# EAGLE board board_rev3 (EAGLE 4.16)

Size 64.75 x 153.34 mm. Coordinates in mm from the lower left corner, seen from the top.
Outline: 0,0 64.75,2.54 64.75,153.34 0,153.34 0,0
Copper layers (1*16): Top 0.035mm / dielectric 1.5mm / Bottom 0.035mm
Design rules "default": minimum track width 10mil, minimum drill 24mil, track to track 8mil, track to pad 8mil, pad to pad 8mil, via to via 8mil, smd to smd 8mil, copper to edge 40mil, drill to drill 8mil, minimum pad ring 10mil, minimum via ring 8mil, stop-mask expansion 4mil, vias tented up to drill 0mil, thermal gap 10mil

## Footprints (pad centres in the part's own frame; a part is rotated, then mirrored left to right if it is on the bottom)
CAP_POLI = drill 0.8 round: . -5.08,0; .. 0,0
E5-10,5 = drill 1.016 pad 2.54 round: + -2.54,0 | drill 1.016 pad 2.54 octagon: - 2.54,0
E2,5-6 = drill 0.813 pad 1.6 round: + -1.27,0 | drill 0.813 pad 1.6 octagon: - 1.27,0
DO35-10 = drill 0.813 long: A 5.08,0; C -5.08,0
CR2032V = drill 1.321 pad 3.15 octagon: + -2.54,-5.08; +@1 -2.54,5.08; - 2.286,0
DIL16 = drill 0.813 long: 1 -8.89,-3.81; 2 -6.35,-3.81; 3 -3.81,-3.81; 4 -1.27,-3.81; 5 1.27,-3.81; 6 3.81,-3.81; 7 6.35,-3.81; 8 8.89,-3.81; 9 8.89,3.81; 10 6.35,3.81; 11 3.81,3.81; 12 1.27,3.81; 13 -1.27,3.81; 14 -3.81,3.81; 15 -6.35,3.81; 16 -8.89,3.81
DIL14 = drill 0.813 long: 1 -7.62,-3.81; 2 -5.08,-3.81; 3 -2.54,-3.81; 4 0,-3.81; 5 2.54,-3.81; 6 5.08,-3.81; 7 7.62,-3.81; 8 7.62,3.81; 9 5.08,3.81; 10 2.54,3.81; 11 0,3.81; 12 -2.54,3.81; 13 -5.08,3.81; 14 -7.62,3.81
DIL08 = drill 0.813 long: 1 -3.81,-3.81; 2 -1.27,-3.81; 3 1.27,-3.81; 4 3.81,-3.81; 5 3.81,3.81; 6 1.27,3.81; 7 -1.27,3.81; 8 -3.81,3.81
ADT7318SMD = smd 0.635 x 1.27: 1 -10.16,-1.27; 2 -8.89,-1.27; 3 -7.62,-1.27; 4 -6.35,-1.27; 5 -5.08,-1.27; 6 -3.81,-1.27; 7 -2.54,-1.27; 8 -1.27,-1.27; 9 -1.27,3.81; 10 -2.54,3.81; 11 -3.81,3.81; 12 -5.08,3.81; 13 -6.35,3.81; 14 -7.62,3.81; 15 -8.89,3.81; 16 -10.16,3.81
FOX = drill 0.8 pad 1.93 round: J6.1 67.31,0; J6.2 69.85,0; J6.3 67.31,-2.54; J6.4 69.85,-2.54; J6.5 67.31,-5.08; J6.6 69.85,-5.08; J6.7 67.31,-7.62; J6.8 69.85,-7.62; J6.9 67.31,-10.16; J6.10 69.85,-10.16; J6.11 67.31,-12.7; J6.12 69.85,-12.7; J6.13 67.31,-15.24; J6.14 69.85,-15.24; J6.15 67.31,-17.78; J6.16 69.85,-17.78; J6.17 67.31,-20.32; J6.18 69.85,-20.32; J6.19 67.31,-22.86; J6.20 69.85,-22.86; J6.21 67.31,-25.4; J6.22 69.85,-25.4; J6.23 67.31,-27.94; J6.24 69.85,-27.94; J6.25 67.31,-30.48; J6.26 69.85,-30.48; J6.27 67.31,-33.02; J6.28 69.85,-33.02; J6.29 67.31,-35.56; J6.30 69.85,-35.56; J6.31 67.31,-38.1; J6.32 69.85,-38.1; J6.33 67.31,-40.64; J6.34 69.85,-40.64; J6.35 67.31,-43.18; J6.36 69.85,-43.18; J6.37 67.31,-45.72; J6.38 69.85,-45.72; J6.39 67.31,-48.26; J6.40 69.85,-48.26; J7.1 0,0; J7.2 2.54,0; J7.3 0,-2.54; J7.4 2.54,-2.54; J7.5 0,-5.08; J7.6 2.54,-5.08; J7.7 0,-7.62; J7.8 2.54,-7.62; J7.9 0,-10.16; J7.10 2.54,-10.16; J7.11 0,-12.7; J7.12 2.54,-12.7; J7.13 0,-15.24; J7.14 2.54,-15.24; J7.15 0,-17.78; J7.16 2.54,-17.78; J7.17 0,-20.32; J7.18 2.54,-20.32; J7.19 0,-22.86; J7.20 2.54,-22.86; J7.21 0,-25.4; J7.22 2.54,-25.4; J7.23 0,-27.94; J7.24 2.54,-27.94; J7.25 0,-30.48; J7.26 2.54,-30.48; J7.27 0,-33.02; J7.28 2.54,-33.02; J7.29 0,-35.56; J7.30 2.54,-35.56; J7.31 0,-38.1; J7.32 2.54,-38.1; J7.33 0,-40.64; J7.34 2.54,-40.64; J7.35 0,-43.18; J7.36 2.54,-43.18; J7.37 0,-45.72; J7.38 2.54,-45.72; J7.39 0,-48.26; J7.40 2.54,-48.26
DS1307 = drill 0.8 long: 1 -8.89,-5.08; 2 -6.35,-5.08; 3 -3.81,-5.08; 4 -1.27,-5.08; 5 -1.27,2.54; 6 -3.81,2.54; 7 -6.35,2.54; 8 -8.89,2.54
Q = drill 0.61 long: 1 -2.54,-7.62; 2 2.54,-7.62
TO92-EBC = drill 0.813 long: B 0,-1.27; C -2.54,-1.27; E 2.54,-1.27
TO126AV = drill 1.016 long: B 2.286,-1.27; C 0,-1.27; E -2.286,-1.27
0207/10 = drill 0.813 octagon: 1 -5.08,0; 2 5.08,0
LI10 = drill 1.321 octagon: A -2.54,-5.08; E 2.54,-5.08; S 0,5.08
MA03-2 = drill 1.016 round: 1 -2.54,-1.27 | drill 1.016 octagon: 2 -2.54,1.27; 3 0,-1.27; 4 0,1.27; 5 2.54,-1.27; 6 2.54,1.27
MA03-1 = drill 1.016 long: 1 -2.54,0; 2 0,0; 3 2.54,0
22-23-2041 = drill 0.813 long: 1 -3.81,0; 2 -1.27,0; 3 1.27,0; 4 3.81,0
22-23-2021 = drill 0.813 long: 1 -1.27,0; 2 1.27,0

## Placement (x,y rotation side)
C1  47nF  [CAP_POLI]  -156.85,110.96 0 top  (outside the outline)
C4  47nF  [CAP_POLI]  -174.63,110.96 0 top  (outside the outline)
C5  47nF  [CAP_POLI]  -192.41,110.96 0 top  (outside the outline)
C6  47nF  [CAP_POLI]  -210.19,110.96 0 top  (outside the outline)
C7  47nF  [CAP_POLI]  -38.74,130.01 90 top  (outside the outline)
C8  47nF  [CAP_POLI]  -50.17,126.2 0 top  (outside the outline)
C9  470uF  [E5-10,5]  26.03,47.46 270 top
C10  470uF  [E5-10,5]  50.16,47.46 270 top
C11  47nF  [CAP_POLI]  -67.95,126.2 0 top  (outside the outline)
C12  47nF  [CAP_POLI]  -85.73,126.2 0 top  (outside the outline)
C13  47nF  [CAP_POLI]  -103.51,126.2 0 top  (outside the outline)
C14  470uF  [E2,5-6]  -71.76,161.76 0 top  (outside the outline)
C15  47nF  [CAP_POLI]  -121.29,126.2 0 top  (outside the outline)
D1  1N4148  [DO35-10]  61.59,103.34 90 top
G1  CR2032V  [CR2032V]  56.51,113.5 180 top
IC2  PCF8574P  [DIL16]  22.22,86.83 270 top
IC3  LF347N  [DIL14]  -135.26,9.36 0 top  (outside the outline)
IC4  PCF8591P  [DIL16]  24.76,133.82 270 top
IC5  MAX412CPA  [DIL08]  8.25,90.64 0 top
IC6  ADT7316SMD  [ADT7318SMD]  -41.28,37.3 0 top  (outside the outline)
IC7  LF347N  [DIL14]  -163.2,9.36 0 top  (outside the outline)
IC9  FOX  [FOX]  56.51,71.59 270 top
IC14  DS1307  [DS1307]  51.43,102.07 90 top
IC17  PCF8591P  [DIL16]  41.27,110.96 270 top
Q1  [Q]  51.43,93.18 90 top
Q2  BC548  [TO92-EBC]  -197.49,137.63 0 top  (outside the outline)
Q3  BD438  [TO126AV]  -184.79,138.9 0 top  (outside the outline)
R1  4k7  [0207/10]  36.19,79.21 180 top
R2  4k7  [0207/10]  50.16,75.4 180 top
R3  [0207/10]  -70.49,146.52 0 top  (outside the outline)
R4  [0207/10]  -88.27,146.52 0 top  (outside the outline)
R5  [LI10]  -224.16,9.36 0 top  (outside the outline)
R6  [LI10]  -33.66,95.72 0 top  (outside the outline)
R7  [LI10]  -47.63,95.72 0 top  (outside the outline)
R8  [LI10]  -61.6,95.72 0 top  (outside the outline)
R9  [0207/10]  -106.05,146.52 0 top  (outside the outline)
R10  [0207/10]  -123.83,146.52 0 top  (outside the outline)
R11  [0207/10]  -141.61,146.52 0 top  (outside the outline)
R12  [0207/10]  -159.39,146.52 0 top  (outside the outline)
R13  [0207/10]  -177.17,146.52 0 top  (outside the outline)
R14  [0207/10]  -194.95,146.52 0 top  (outside the outline)
R15  [0207/10]  -212.73,146.52 0 top  (outside the outline)
R16  [0207/10]  -34.93,154.14 0 top  (outside the outline)
R17  [0207/10]  -52.71,154.14 0 top  (outside the outline)
R18  [0207/10]  -70.49,154.14 0 top  (outside the outline)
R19  [LI10]  -75.57,95.72 0 top  (outside the outline)
R20  [LI10]  -89.54,95.72 0 top  (outside the outline)
R21  [0207/10]  -88.27,154.14 0 top  (outside the outline)
R22  [0207/10]  -106.05,154.14 0 top  (outside the outline)
R23  [LI10]  -103.51,95.72 0 top  (outside the outline)
R24  [0207/10]  -123.83,154.14 0 top  (outside the outline)
R25  [0207/10]  -141.61,154.14 0 top  (outside the outline)
R26  [0207/10]  -159.39,154.14 0 top  (outside the outline)
R27  [0207/10]  -177.17,154.14 0 top  (outside the outline)
R28  [0207/10]  -194.95,154.14 0 top  (outside the outline)
R29  [0207/10]  -212.73,154.14 0 top  (outside the outline)
R30  [0207/10]  -34.93,161.76 0 top  (outside the outline)
R31  [0207/10]  -52.71,161.76 0 top  (outside the outline)
R40  [LI10]  -117.48,95.72 0 top  (outside the outline)
R41  [LI10]  -131.45,95.72 0 top  (outside the outline)
R42  [LI10]  -145.42,95.72 0 top  (outside the outline)
R43  [LI10]  -159.39,95.72 0 top  (outside the outline)
R44  [LI10]  -173.36,95.72 0 top  (outside the outline)
SV1  [MA03-2]  -173.36,124.93 0 top  (outside the outline)
SV2  [MA03-2]  -186.06,124.93 0 top  (outside the outline)
SV3  [MA03-2]  -198.76,124.93 0 top  (outside the outline)
SV4  [MA03-2]  -211.46,124.93 0 top  (outside the outline)
SV5  [MA03-2]  -224.16,124.93 0 top  (outside the outline)
SV6  [MA03-2]  -32.39,137.63 0 top  (outside the outline)
SV7  [MA03-2]  -45.09,137.63 0 top  (outside the outline)
SV8  [MA03-2]  -57.79,137.63 0 top  (outside the outline)
SV9  [MA03-2]  -70.49,137.63 0 top  (outside the outline)
SV10  [MA03-2]  -83.19,137.63 0 top  (outside the outline)
SV11  [MA03-1]  -210.19,136.36 0 top  (outside the outline)
SV12  [MA03-2]  -95.89,137.63 0 top  (outside the outline)
SV13  [MA03-2]  -108.59,137.63 0 top  (outside the outline)
SV14  [MA03-2]  -121.29,137.63 0 top  (outside the outline)
SV15  [MA03-2]  -133.99,137.63 0 top  (outside the outline)
SV16  [MA03-2]  -146.69,137.63 0 top  (outside the outline)
SV17  [MA03-2]  61.59,81.75 270 top
SV21  [MA03-2]  -172.09,137.63 0 top  (outside the outline)
X15  22-23-2041  [22-23-2041]  38.73,43.65 270 top
X16  22-23-2041  [22-23-2041]  61.59,46.19 270 top
X20  22-23-2021  [22-23-2021]  -142.88,110.96 0 top  (outside the outline)

## Library data of the parts
C1 C4-C8 C11-C13 C15 IC6 IC9 IC14 = aggiunte
C9 C10 C14 R1-R4 R9-R18 R21 R22 R24-R31 = rcl
D1 = diode
G1 = battery
IC2 IC4 IC17 = micro-philips
IC3 IC7 = linear
IC5 = maxim
Q1 = special
Q2 = transistor-npn
Q3 = transistor-power
R5-R8 R19 R20 R23 R40-R44 = pot
SV1-SV17 SV21 = con-lstb
X15 X16 X20 = con-molex

## Nets
5V: SV2.5 SV3.5 SV4.4 SV5.4 SV6.5 SV7.5 SV8.5 SV9.5 SV10.5 SV12.5 SV13.5 SV14.5 SV15.5 SV16.5 SV17.5 SV21.5
+5V: C1.. C4.. C5.. C6.. C7.. C9.+ C11.. C12.. C13.. C14.+ C15.. IC2.16 IC3.4 IC4.5 IC4.6 IC4.14 IC4.16 IC5.8 IC7.4 IC14.8 IC17.5 IC17.7 IC17.14 IC17.16 R1.1 R2.1 R9.1 R16.1 R23.E R40.E R41.E R42.E R43.E R44.E SV11.3 X15.1 X16.1 X20.1
+12V: C10.+ Q3.E SV11.1 SV13.4 SV14.4 SV15.4 X16.2
-5V: C8.. R23.A R40.A R41.A R42.A R43.A R44.A
CH0: IC3.14 IC17.1 R20.S
CH1: IC3.8 IC17.2 R19.S
CH2: IC3.7 IC17.3 R8.S
CH3: IC3.1 IC17.4 R7.S
CONTRASTO: IC2.11
GND: C1... C4... C5... C6... C7... C8... C9.- C10.- C11... C12... C13... C14.- C15... G1.- IC2.1 IC2.2 IC2.3 IC2.8 IC3.3 IC3.5 IC3.10 IC3.12 IC4.7 IC4.8 IC4.12 IC4.13 IC5.3 IC5.5 IC6.4 IC6.5 IC14.4 IC17.6 IC17.8 IC17.12 IC17.13 Q2.E R10.1 R15.1 SV2.1 SV3.1 SV6.1 SV7.1 SV8.1 SV9.1 SV10.1 SV12.1 SV13.1 SV14.1 SV15.1 SV16.1 SV17.1 SV21.1 X15.2 X15.3 X16.3
N$1: IC2.4 R21.1
N$2: IC7.14 R13.2 R14.2
N$3: IC7.1 R17.2 R18.2
N$4: IC7.9 SV4.1
N$5: IC7.10 SV4.5
N$6: IC7.5 SV5.5
N$7: IC7.6 SV5.1
N$8: IC7.13 R10.2 R14.1
N$9: IC4.1 IC5.1 R5.S
N$10: IC4.2 IC5.7 R6.S
N$11: IC2.7 SV21.3
N$12: D1.A G1.+
N$13: IC4.3 IC7.8
N$14: Q3.B R22.2
N$15: IC6.1 SV14.3
N$16: IC2.5 R22.1
N$17: IC6.16 SV13.3
N$18: IC2.6 SV12.3
N$19: Q3.C SV16.3
N$20: D1.C IC14.3
N$21: IC6.3 IC6.6 IC6.14 SV11.2
N$22: IC4.4 IC7.7
N$23: IC6.2
N$25: IC2.12 IC6.9
N$26: Q2.B R21.2
N$27: Q2.C X20.2
N$28: IC7.2 R15.2 R17.1
N$29: IC7.12 R9.2 R13.1 SV4.3
N$31: R12.1 R40.S
N$32: IC7.3 R16.2 R18.1 SV5.3
N$58: IC5.2 R3.2 R4.2 R5.E
N$60: R3.1 SV2.3
N$62: R4.1 R23.S
N$63: IC5.6 R6.E R11.2 R12.2
N$69: R11.1 SV3.3
N$83: IC14.1 Q1.1
N$84: IC14.2 Q1.2
N$113: IC3.2 R7.E R24.2 R25.2
N$114: IC3.6 R8.E R26.2 R27.2
N$115: IC3.9 R19.E R28.2 R29.2
N$116: IC3.13 R20.E R30.2 R31.2
N$117: R31.1 SV9.3
N$119: R29.1 SV8.3
N$121: R30.1 R41.S
N$122: R28.1 R42.S
N$123: R26.1 R43.S
N$124: R27.1 SV7.3
N$125: R24.1
N$126: R25.1 R44.S
SCL: IC2.14 IC4.10 IC6.13 IC9.J7.13 IC14.6 IC17.10 R2.2 SV2.2 SV3.2 SV4.2 SV5.2 SV6.2 SV7.2 SV8.2 SV9.2 SV10.2 SV12.2 SV13.2 SV14.2 SV15.2 SV16.2 SV17.2 SV21.2
SDA: IC2.15 IC4.9 IC6.12 IC9.J7.21 IC14.5 IC17.9 R1.2 SV2.6 SV3.6 SV4.6 SV5.6 SV6.6 SV7.6 SV8.6 SV9.6 SV10.6 SV12.6 SV13.6 SV14.6 SV15.6 SV16.6 SV17.6 SV21.6
V-: IC3.11 IC5.4 IC7.11 X16.4

## Tracks (layer width: path | path; a pad name or v marks a point on that pad's centre or on a via)
5V  (15 unrouted)
+5V  (37 unrouted)
+12V  (6 unrouted)
-5V  (6 unrouted)
CH0  (2 unrouted)
CH1  (2 unrouted)
CH2  (2 unrouted)
CH3  (2 unrouted)
GND  (54 unrouted)
N$1  (1 unrouted)
N$2  (2 unrouted)
N$3  (2 unrouted)
N$4  (1 unrouted)
N$5  (1 unrouted)
N$6  (1 unrouted)
N$7  (1 unrouted)
N$8  (2 unrouted)
N$9  (2 unrouted)
N$10  (2 unrouted)
N$11  (1 unrouted)
N$12  (1 unrouted)
N$13  (1 unrouted)
N$14  (1 unrouted)
N$15  (1 unrouted)
N$16  (1 unrouted)
N$17  (1 unrouted)
N$18  (1 unrouted)
N$19  (1 unrouted)
N$20  (1 unrouted)
N$21  (3 unrouted)
N$22  (1 unrouted)
N$25  (1 unrouted)
N$26  (1 unrouted)
N$27  (1 unrouted)
N$28  (2 unrouted)
N$29  (3 unrouted)
N$31  (1 unrouted)
N$32  (3 unrouted)
N$58  (3 unrouted)
N$60  (1 unrouted)
N$62  (1 unrouted)
N$63  (3 unrouted)
N$69  (1 unrouted)
N$83  (1 unrouted)
N$84  (1 unrouted)
N$113  (3 unrouted)
N$114  (3 unrouted)
N$115  (3 unrouted)
N$116  (3 unrouted)
N$117  (1 unrouted)
N$119  (1 unrouted)
N$121  (1 unrouted)
N$122  (1 unrouted)
N$123  (1 unrouted)
N$124  (1 unrouted)
N$126  (1 unrouted)
SCL  (22 unrouted)
SDA  (22 unrouted)
V-  (3 unrouted)